# Altium PCB PCB1.PcbDoc
Units mm, origin at the board's own origin, x right, y up, seen from the top; angles counter-clockwise.
Board outline 41.5 x 27.72 mm, 2 copper layers (Top Layer, Bottom Layer); 18 components, 11 nets, 47 pads, 38 vias.
Unrouted connection lines stored in the file: 1.
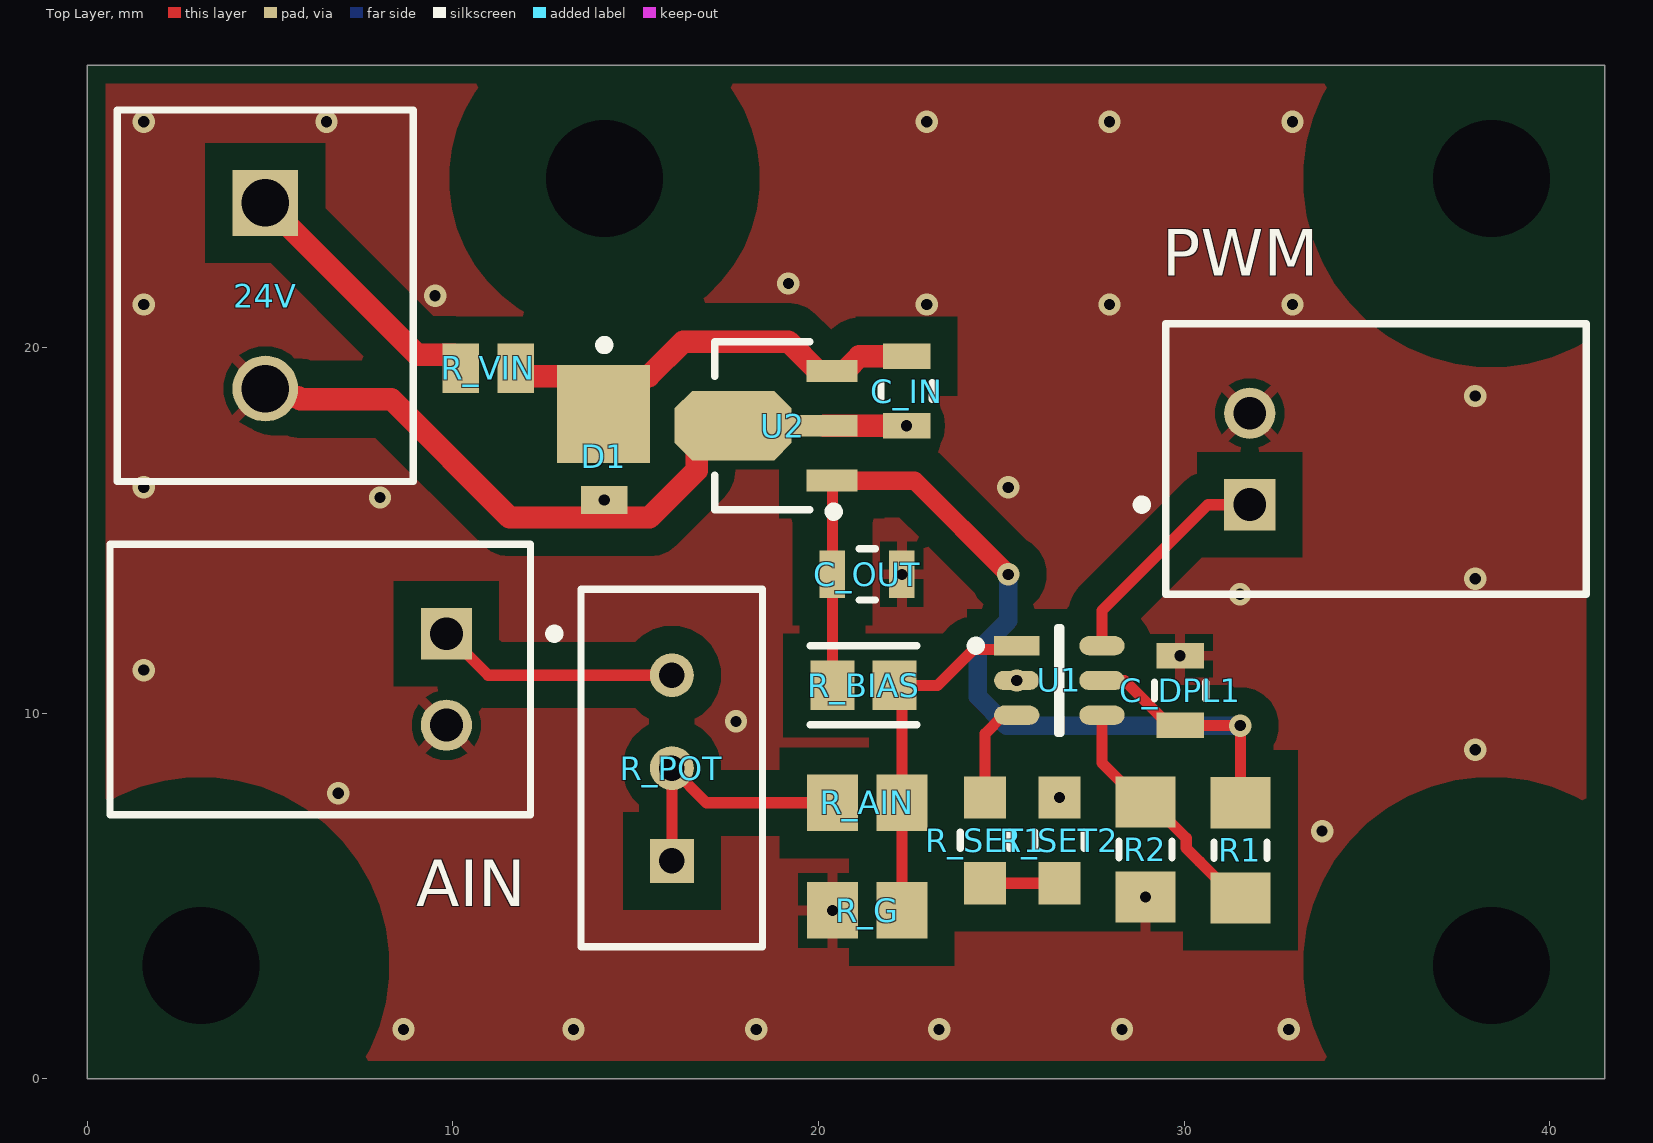
[diagram p0: Top Layer view]
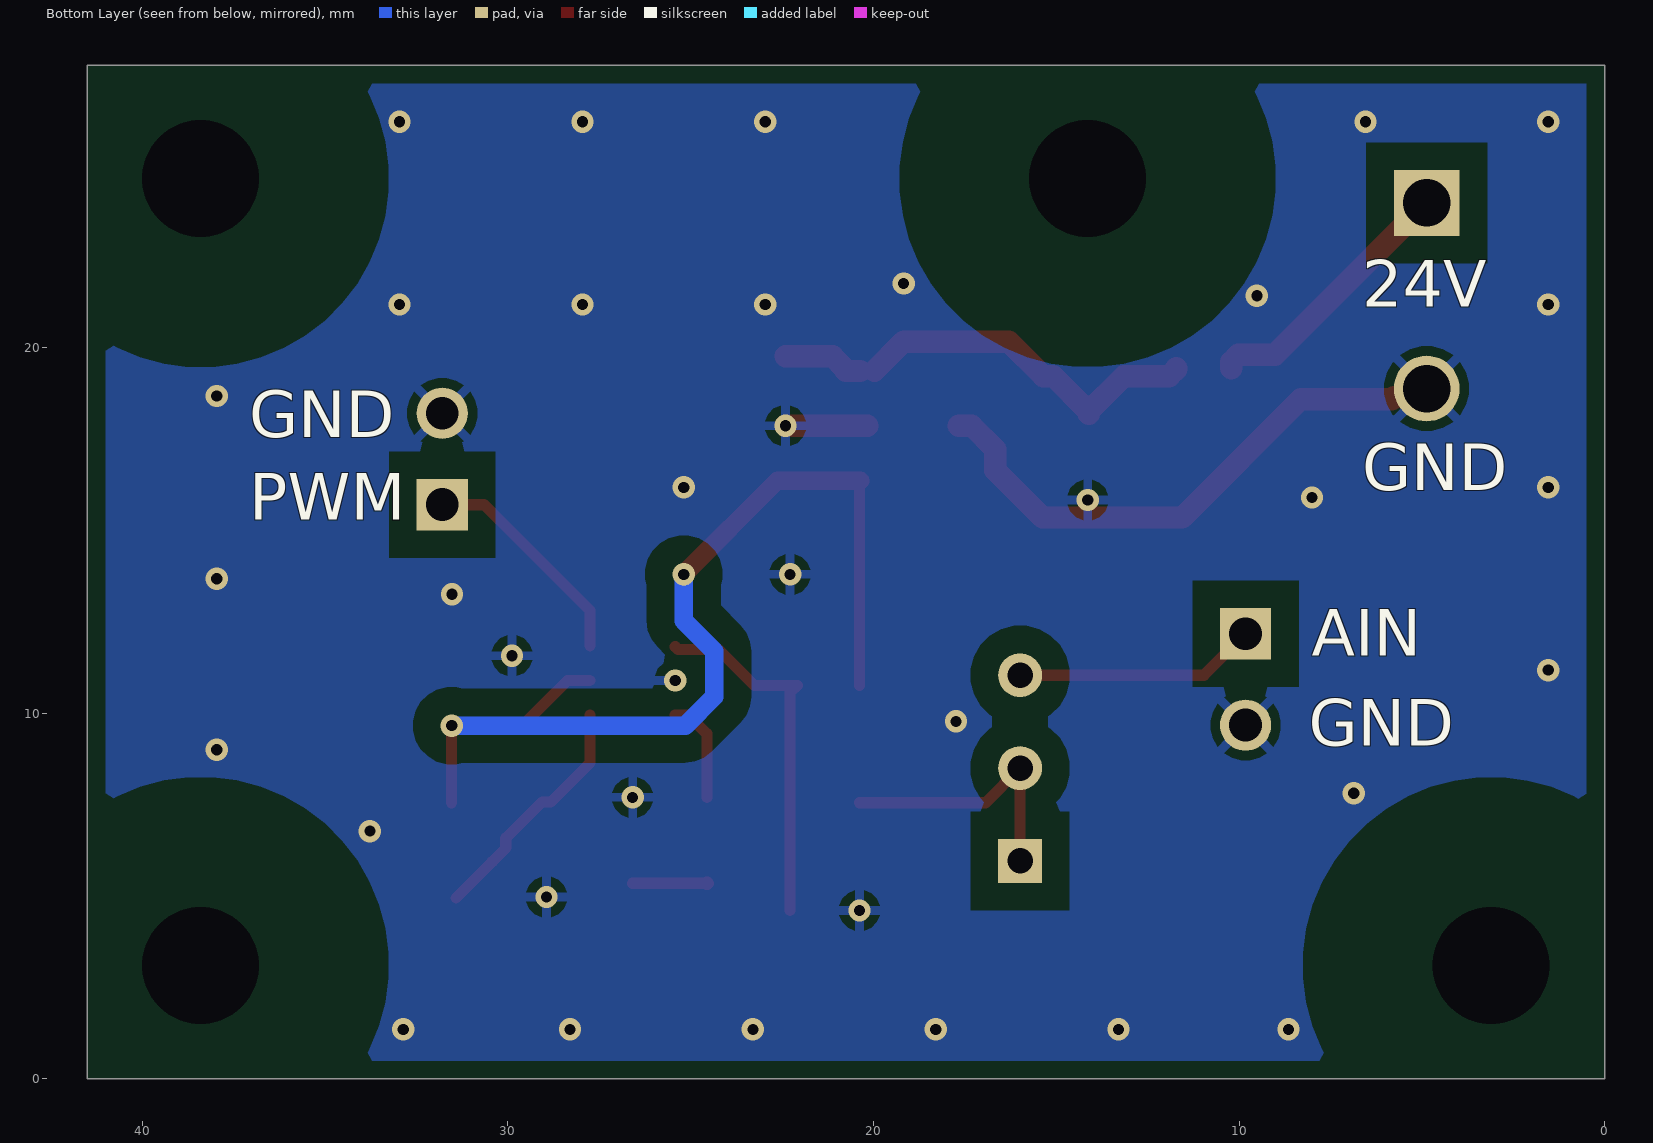
[diagram p1: Bottom Layer view, seen from below]
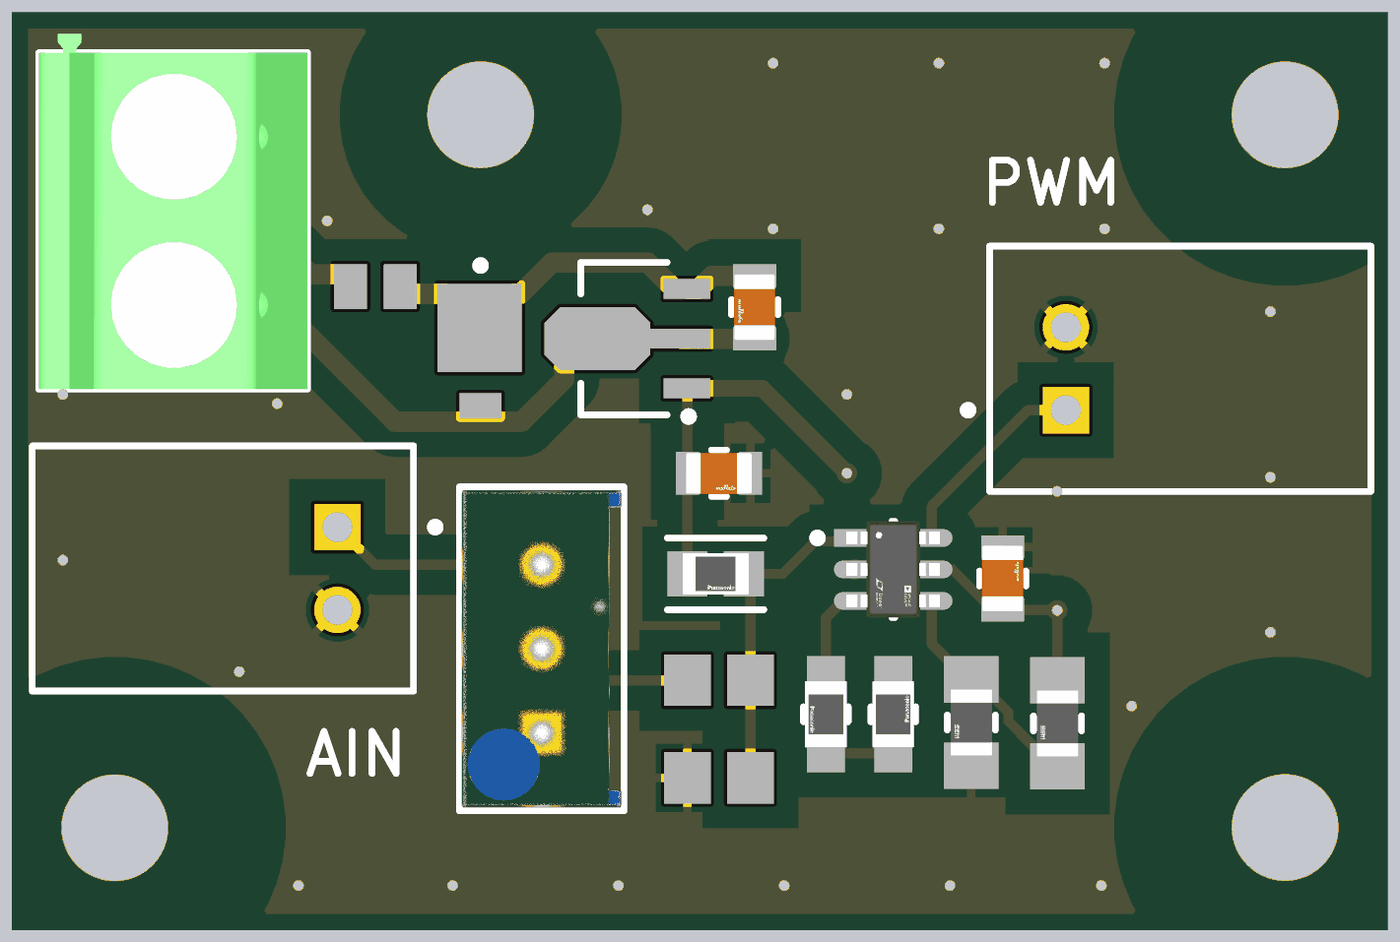
[diagram p2: 3D render of the assembled board from above, using the file's embedded part models]

## Layer stack, top to bottom
Top Solder: solder mask 0.0102, Solder Resist, Dk 3.5
Top Layer: signal copper 0.0356
Dielectric 1: dielectric 0.32, FR-4, Dk 4.8
Bottom Layer: signal copper 0.0356
Bottom Solder: solder mask 0.0102, Solder Resist, Dk 3.5

## Board outline
0,0 41.5,0 41.5,27.72 0,27.72

## Design rules (kind name [scope] priority, off if disabled: settings)
Clearance [All] p1: gap=0.75 ignorepadtopadclearanceinfootprint=FALSE
PlaneClearance [All] p1: clearance=1.5
PolygonConnect [All] p1: thpad.connectstyle=Relief thpad.reliefconductorwidth=0.254 thpad.reliefentries=4 thpad.polygonreliefangle="90 Angle" thpad.airgapwidth=0.254 thpad.conductorbypadedge=TRUE thpad.mindistance=0.381 thpad.enablemindistance=FALSE smdpad.connectstyle=Relief smdpad.reliefconductorwidth=0.254 smdpad.reliefentries=4 smdpad.polygonreliefangle="90 Angle" smdpad.airgapwidth=0.254 smdpad.conductorbypadedge=TRUE smdpad.mindistance=0.381 smdpad.enablemindistance=FALSE via.connectstyle=Direct via.reliefconductorwidth=0.254 via.reliefentries=4 via.polygonreliefangle="90 Angle" via.airgapwidth=0.254
RoutingVias [All] p1: holewidth=0.711 width=1.27 viastyle="Through Hole" minholewidth=0.305 minwidth=0.61 maxholewidth=0.711 maxwidth=1.27
SolderMaskExpansion [All] p1: expansion=0.102 istentingtop=FALSE
SupplyNets "Schematic Supply Nets" [InNet('GND')] p1: voltage=0.000
Width [All] p1: maxlimit=0.762 minlimit=0.127 preferedwidth=0.508 bottomlayer_minwidth=0.254 minimp=50.000000 maximp=50.000000 favimp=50.000000
29 further rules are at their usual default settings.

## Components (designator, comment, footprint, x,y, rotation, side; value= is the part's Value field where it differs from the comment)
24V "1729128" PHOE-1729128-2_V 4.868,21.419 r270 top (schematic designator J1)
AIN "Analog IN" JST-S2B-XH-A(LF)(SN)_V 9.822,10.924 r270 top (schematic designator P_AIN)
C_DPL1 "0.1μF" FP-GCM21B-0_15-MFG 29.887,10.624 r90 top
C_IN "0.33μF" FP-GCM219-0_15-MFG 22.406,18.813 r270 top
C_OUT "0.1μF" FP-GCM21B-0_15-MFG 21.329,13.799 r0 top
D1 "27V" ONSC-POWERMITE-2-457-04_D_V 14.139,16.85 r270 top
PWM "PWM OUT" JST-S2B-XH-A(LF)(SN)_V 31.792,16.954 r90 top (schematic designator P_OUT)
R1 "1MΩ" FP-RG2012-MFG 31.538,6.249 r270 top
R2 "28kΩ" FP-RG2012-MFG 28.941,6.274 r270 top
R_AIN "4.7kΩ" RESC2013X60X40ML20T25 21.329,7.549 r0 top
R_BIAS "100kΩ" FP-ERA6A-IPC_B 21.229,10.762 r0 top
R_G "2kΩ" RESC2013X60X40ML20T25 21.329,4.606 r0 top
R_POT "3296W-1-202LF" FP-3296W-MFG 15.984,8.499 r0 top
R_SET1 "150kΩ" FP-ERA6A-MFG 24.553,6.524 r270 top
R_SET2 "47KΩ" FP-ERA6A-MFG 26.585,6.524 r90 top
R_VIN "330Ω" RESC2013X60X40LL20T25 10.964,19.438 r0 top
U1 "LTC6992MPS6-1#TRMPBF" FP-S6-6-05-08-1636-IPC_B 26.585,10.896 r0 top
U2 "L78L05ABUTR" SOT-89_N 18.463,17.863 r180 top

## Footprints (in the part's own frame and the unit in brackets; to place one, negate y for a bottom-side part, rotate by r counter-clockwise, add the part's x,y. Pads: shape width x height; smd on the part's side, far side on the other; paste and mask are expansions set on the pad)
FP-3296W-MFG [mm]
  rect 1.2x1.2 hole 0.7 paste-2539.97 mask+0: 1(0.005,-2.54)
  round 1.2 hole 0.7 paste-2539.97 mask+0: 2(0.005,0) 3(0.005,2.54)
  silkscreen extent -2.48,-4.89 2.48,4.89, body extent -2.58,-4.99 2.58,4.99, height 0.25
FP-ERA6A-IPC_B [mm]
  rect 1.205x1.362 smd paste+0 mask+0: 1(-0.851,0) 2(0.851,0)
  silkscreen extent -1.45,-1.08 1.45,1.08, body extent -1.7,-0.93 1.7,0.93, height 0.25
FP-ERA6A-MFG [mm]
  rect 1.15x1.15 smd paste+0 mask+0: 1(-1.175,0) 2(1.175,0)
  silkscreen extent -0.22,-0.67 0.22,0.67, body extent -1.85,-0.77 1.85,0.77, height 0.25
FP-GCM21B-0_15-MFG [mm]
  rect 0.7x1.3 smd paste+0 mask+0: 1(-0.95,0) 2(0.95,0)
  silkscreen extent -0.22,-0.7 0.22,0.7, body extent -1.4,-0.8 1.4,0.8, height 0.25
FP-GCM219-0_15-MFG [mm]
  rect 0.7x1.3 smd paste+0 mask+0: 1(-0.95,0) 2(0.95,0)
  silkscreen extent -0.23,-0.7 0.22,0.7, body extent -1.4,-0.8 1.4,0.8, height 0.25
FP-RG2012-MFG [mm]
  rect 1.4x1.65 smd paste+0 mask+0: 1(-1.3,0) 2(1.3,0)
  silkscreen extent -0.23,-0.73 0.23,0.73, body extent -2.1,-0.92 2.1,0.92, height 0.25
FP-S6-6-05-08-1636-IPC_B [mm]
  rect 1.24x0.526 smd paste+0 mask+0: 1(-1.166,0.95)
  rrect100% 1.24x0.526 smd paste+0 mask+0: 2(-1.166,0) 3(-1.166,-0.95) 4(1.166,-0.95) 5(1.166,0) 6(1.166,0.95)
  silkscreen extent -2.41,-1.45 0.05,1.45, body extent -2.04,-1.7 2.04,1.7, height 0.25
JST-S2B-XH-A(LF)(SN)_V [mm] "Header, 2-Leads, Body 7.4x11.5mm, Pitch 2.5mm"
  rect 1.4x1.4 hole 0.9: 1(-1.25,0)
  round 1.4 hole 0.9: 2(1.25,0)
  silkscreen extent -3.7,-9.2 3.7,3.08, body extent -3.7,-9.2 3.7,2.3, height 6.1
ONSC-POWERMITE-2-457-04_D_V [mil] "POWERMITE, 2-Leads, Body 1.965x1.9mm"
  rect 105.12x100 smd: 1(-52.56,-1)
  rect 30x50 smd: 2(40,0)
  silkscreen extent -132,-5 -122,5, body extent -80,-37 -3,37, height 45
PHOE-1729128-2_V [mm] "Receptacle, 2-Leads, Body 8.1x10.16mm, Pitch 5.08mm"
  rect 1.8x1.8 hole 1.3: 1(-2.54,0)
  round 1.8 hole 1.3: 2(2.54,0)
  silkscreen extent -5.08,-4.05 5.08,4.05, body extent -5.65,-4.05 5.08,4.05, height 10.01
RESC2013X60X40LL20T25 [mm] "Chip Resistor, 2-Leads, Body 2.00x1.25mm, IPC High Density"
  rect 1x1.35 smd: 1(-0.75,0) 2(0.75,0)
  body extent -1.1,-0.72 1.1,0.72, height 0.6
RESC2013X60X40ML20T25 [mm] "Chip Resistor, 2-Leads, Body 2.00x1.25mm, IPC Low Density"
  rect 1.4x1.55 smd: 1(-0.95,0) 2(0.95,0)
  body extent -1.1,-0.72 1.1,0.72, height 0.6
SOT-89_N [mm] "SOT89, 3-Leads, Body 4.5x2.4 mm, Pitch 1.5mm, Lead Span 4.1mm, IPC Medium Density"
  rect 1.4x0.6 smd: 1(-1.9,1.5) 3(-1.9,-1.5)
  rect 1.8x0.6 smd: 2(-1.7,0)
  oct 3.2x1.9 smd: 2(0.8,0)
  silkscreen extent -2.08,-2.3 1.3,2.47, body extent -1.3,-2.3 1.3,2.3, height 1.6

## Part data
24V: library part CMP-2000-05815-1, "PCB Terminal Block, 13.5 A, 400 V, 2-Pin THD, RoHS, Bulk", Current Rating=13500mA, Manufacturer="Phoenix Contact", Package Description="2-Pin Through Hole Device, Body 8.1 x 10.16 mm, Pitch 5.08 mm", Package Reference=1729128-2, Package Version=03/2015, Voltage Rating=400V, Datasheet URL=https://datasheet.ciiva.com/16046/1729128-16046181.pdf, Datasheet Version=12/2013, Manufacturer URL=http://www.phoenixcontact.com/, Mounting Technology=ThroughHole, No. of Positions=2, No. of Rows=1, Orientation=Horizontal, Package URL=https://www.phoenixcontact.com/online/portal/pi/pxc/product_detail_page/!ut/p/b1/3VdJjqNKFDxLH8AFycySyWY2ozFsEPOMMQaDOX1XedGL_1Vdm5YXJleknhSKeBkvI6EA8ncAo3AYoDhBQGco6KN7VURTdemj9us_IEKEZo_YHiPAEWEFmDGOHMORkqKYCORBZxgL7ZoaZYcbFFUZ3fqxSY6GOuxydWUuHqz1ynmMFygu583Bob0Ewr6Sd_l-5m-kAueHiB0jpRwZwe58wwtkpxtMYd_LmGcDRU02dRNEyWt6Y2ti5pSyJ_reIkzIulrqApdnbT11V5jnCKbYNCvhEM1MCpPByat_X379-iThf08CI5GfOPqfBeS3BRoBOdD55AKVv0iLwCMq-2BrzXWSGRH7pUGD9uwXQjiph3xL0DKQwdGa0JImiIOmBNOestqgwTHSSs2oOep-78apyXQBvNi8ZLaFjvjWvcaUEBu0MC6Wbe-d6mB0FAebo2lUWinqYaZs5DAYzV0RP9yitUjnGJ0iI9xhZkT42OCQNUJJhkgWINNQLP2JFP6OpMg3JCVg70jqHT0lvKOnhHf0lPuOnnLf0VPuWx6_dxwUIvwk5WMkT0kLL1mh61l2yZVSzG3pYV_bqo-mj6uMKwKwdnnW8Jh5RTOJzMOA5c-eJDaZQw4mTMPH02PvS_ZAqNVjVTo2WyYLkwH_KU1mmmG5kjRhDqPXLwwVHvVOjCM60-fpXvTDfMGW1PVFVS1r4e4yVDk4ZdNbkUHvqPqQSeian4UD39fNKmachqdJ1NJbyk8rXT9mXTvPk3oE5meulKGgiruPJek-4I9hTT6G8ZLOyRSm2RRVbThERQad5OS28hdt4YW4vG0stgYYzsWsK4_7y6DZMjJSCqri1kyiZR5vD7pwIrNR7QwPHTcLTI5qT7eRlpHrdGiupYlqQDJ7zy_CND8fWWBoLRXxk1RVcXiBQwbTD4Xi7KL-FuO94t9xaqweXzH, Packing=Bulk, PartNumber=1729128, Pitch=5.08mm, RoHS=TRUE
AIN PWM: library part CMP-1755-00005-1, "Male Header, Pitch 2.5 mm, 1 x 2 Position, Height 6.1 mm, Tail Length 3.4 mm, -25 to 85 degC, RoHS, Bulk", Capacitance="1 nF", Case\Package=Radial, Max Operating Temperature="125 degC", Min Operating Temperature="-55 degC", Package Quantity=500, Tolerance=10%, Type (Capacitors)=X7R, Voltage Rating="100 V", ComponentLink1Description="Manufacturer URL", ComponentLink1URL=http://www.jst.com/home2.html, ComponentLink2Description=Datasheet, ComponentLink2URL=http://www.jst-mfg.com/product/pdf/eng/eXH.pdf, DatasheetVersion=May-16, Height="2.54 mm", Lead Pitch="2.54 mm", Length="5.33 mm", Mount="Through Hole", PackageDescription="Male Header, Pitch 2.5 mm, 1 x 2 Position, Height 6.1 mm, Tail Length 3.4 mm", PackageReference=S2B-XH-A(LF)(SN), Packaging=Bulk, Pins=2, Radiation Hardening=No, REACH SVHC="No SVHC", RoHSCompliant=true, Voltage Rating (DC)="100 V", Width="3.81 mm"
C_DPL1 C_OUT: library part CMP-2007-03364-2, "Ceramic Capacitor for Automotive 100nF ±10% 100VDC X7R 0805 Embossed T/R", Capacitance=100nF, Case Code (Imperial)=0805, Case Code (Metric)=2012, Dielectric=X7R, Max Operating Temperature=125°C, Min Operating Temperature=-55°C, Package Quantity=1, Ratings=AEC-Q200, Tolerance=10%, Voltage=100V, Case/Package=0805, Depth=1.25mm, Height=1.25mm, Lead Free="Lead Free", Length=2mm, Mount="Surface Mount", Packaging="Tape and Reel", Radiation Hardening=No, REACH SVHC="No SVHC", Termination=SMD/SMT, Thickness=0.055inch, Voltage Rating=100V, Voltage Rating (DC)=100V, Width=0.049inch
C_IN: library part CMP-2007-00092-2, "Ceramic Capacitor for Automotive 330nF  ±10% 50VDC X7R 0805 Paper T/R", Capacitance=330nF, Case Code (Imperial)=0805, Case Code (Metric)=2012, Dielectric=X7R, Max Operating Temperature=125°C, Min Operating Temperature=-55°C, Package Quantity=4000, Ratings=AEC-Q200, Tolerance=10%, Voltage Rating=50V, Case/Package=0805, Depth=1.25mm, Height=0.85mm, Lead Free="Lead Free", Length=2mm, Mount="Surface Mount", Packaging="Tape and Reel", Radiation Hardening=No, Termination=SMD/SMT, Thickness=0.037inch, Voltage Rating (DC)=50V, Width=0.049inch
D1: library part CMP-1060-00053-1, "3.2 W Plastic Surface Mount, 2-Pin POWERMITE, Pb-Free, Tape and Reel", Manufacturer="On Semiconductor", PartNumber=1PMT5935BT1G, ComponentLink1Description="Manufacturer URL", ComponentLink1URL=http://www.onsemi.com/, ComponentLink2Description=Datasheet, ComponentLink2URL=http://www.onsemi.com/pub_link/Collateral/1PMT5920B-D.PDF, ComponentLink3Description="Package Specification", ComponentLink3URL=http://www.onsemi.com/pub_link/Collateral/457-04.PDF, DatasheetVersion="Rev. 4", Mounting Technology="Surface Mount", PackageDescription="2-Pin POWERMITE, Body 1.965 x 1.9 mm", PackageReference=POWERMITE-2-457-04, PackageVersion="Rev. F, 05/2013", Packing="Tape and Reel", RoHS=Pb-Free, VZ Typ (V)=27
R1: library part CMP-2001-02713-2, "Automotive Metal Thin Film Chip Resistor, 0805, 1MΩ, 0.1%, 25ppm/°C, 0.125W, 150V", Case Code (Imperial)=0805, Case Code (Metric)=2012, Max Operating Temperature=155°C, Max Power Dissipation=125mW, Min Operating Temperature=-55°C, Package Quantity=5000, Power Rating=100mW, Resistance=1MR, Temperature Coefficient=25ppm/°C, Tolerance=0.1%, Voltage Rating=100V, Voltage Rating (DC)=150V, Case/Package=0805, Features="Automotive AEC-Q200", Height=0.4mm, Lead Free="Lead Free", Length=2mm, Number of Terminations=2, Packaging="Tape and Reel", RoHS Compliant=Yes, Series=RG, Termination=SMD/SMT, Width=1.25mm
R2: library part CMP-2001-02887-2, "Automotive Metal Thin Film Chip Resistor, 0805, 280kΩ, 0.1%, 25ppm/°C, 0.125W, 150V", Case Code (Imperial)=0805, Case Code (Metric)=2012, Max Operating Temperature=155°C, Max Power Dissipation=125mW, Min Operating Temperature=-55°C, Package Quantity=1, Resistance=280kR, Resistor Type="Thin Film", Temperature Coefficient=25ppm/°C, Tolerance=0.1%, Voltage Rating=150V, Case/Package=0805, Features="Automotive AEC-Q200", Height=0.02inch, Lead Free="Lead Free", Length=0.079inch, Number of Terminations=2, Packaging="Tape and Reel", Power Rating=125mW, RoHS Compliant=Yes, Series=RG, Termination=SMD/SMT, Voltage Rating (DC)=150V, Weight=0.000194oz, Width=0.049inch
R_AIN: library part CMP-2001-00644-1, Manufacturer=Panasonic, Part Number=ERA6AEB472V
R_BIAS: library part CMP-2001-00583-2, "RES 100K OHM 0.1% 1/8W 0805", Case Code (Imperial)=0805, Case Code (Metric)=2012, Max Operating Temperature=155°C, Max Power Dissipation=125mW, Min Operating Temperature=-55°C, Package Quantity=1, Resistance=100kR, Resistance Tolerance=0.1%, Resistor Type="Thin Film", Temperature Coefficient=25ppm/°C, Voltage Rating=100V, Case/Package=0805, Construction=Rectangular, Contact Plating=Tin, Depth=1.25mm, Features="Automotive AEC-Q200", Height=0.5mm, Lead Free="Lead Free", Length=2mm, Military Standard=Not, Mount="Surface Mount", Number of Pins=2, Number of Terminations=2, Packaging="Tape and Reel", Power Rating=125mW, Radiation Hardening=No, REACH SVHC="No SVHC", RoHS Compliant=Yes, Series=ERA-6A, Size Code=0805, Technology="METAL FILM", Termination=Solder, Tolerance=0.1%, Voltage Rating (DC)=100V, Width=1.25mm
R_G: library part CMP-2001-00609-1, Manufacturer=Panasonic, Part Number=ERA6AEB202V
R_POT: library part CMP-2000-05582-2, "TRIMMER 2K OHM 0.5W PC PIN TOP", Color=Blue, Max Operating Temperature=125°C, Max Power Dissipation=500mW, Min Operating Temperature=-55°C, Package Quantity=50, Resistance=2kR, Resistance Tolerance=10%, Resistor Type=Cermet, Temperature Coefficient=100ppm/°C, Contact Plating=Tin, Depth=4.83mm, Height=0.395inch, Lead Free="Lead Free", Length=9.53mm, Military Standard=Not, Mount=Panel, Number of Turns=25, Packaging=Rail/Tube, Power Rating=500mW, Radiation Hardening=No, REACH SVHC="No SVHC", RoHS Compliant=Yes, Series=3296, Taper=Linear, Technology=CERMET, Termination=Pin, Tolerance=10%, Weight=0.03oz, Width=9.53mm
R_SET1: library part CMP-2001-00599-2, "RES 150K OHM 0.1% 1/8W 0805", Case Code (Imperial)=0805, Case Code (Metric)=2012, Max Operating Temperature=155°C, Max Power Dissipation=125mW, Min Operating Temperature=-55°C, Package Quantity=5000, Resistance=150kR, Resistance Tolerance=0.1%, Resistor Type="Thin Film", Temperature Coefficient=25ppm/°C, Voltage Rating=100V, Case/Package=0805, Construction=Rectangular, Contact Plating=Tin, Depth=1.25mm, Height=0.5mm, Lead Free="Lead Free", Length=2mm, Military Standard=Not, Mount="Surface Mount", Number of Pins=2, Number of Terminations=2, Packaging="Tape and Reel", Power Rating=125mW, Radiation Hardening=No, REACH SVHC="No SVHC", RoHS Compliant=Yes, Series=ERA-6A, Technology="METAL FILM", Termination=SMD/SMT, Tolerance=0.1%, Voltage Rating (DC)=100V, Width=1.25mm
R_SET2: library part CMP-2001-00645-2, Case Code (Imperial)=0805, Case Code (Metric)=2012, Max Operating Temperature=155°C, Max Power Dissipation=125mW, Min Operating Temperature=-55°C, Resistance=47kΩ, Temperature Coefficient=25ppm/°C, Tolerance=0.1%, Voltage Rating=100V, Case/Package=0805, Composition="Metal Film, Thin Film", Contact Plating=Tin, Depth=1.25mm, Features="Automotive AEC-Q200", Height=500µm, Lead Free="Lead Free", Length=2mm, Lifecycle Status=Production, Military Standard=Not, Mount="Surface Mount", NexarPartId=1264112, Number of Pins=2, Number of Terminations=2, Packaging="Cut Tape", Power Rating=125mW, Radiation Hardening=No, REACH SVHC="No SVHC", RoHS=Compliant, Schedule B="8533210045, 8533210045", Termination=SMD/SMT, Voltage Rating (DC)=100V, Weight=5.499807mg, Width=1.25mm
R_VIN: library part CMP-2001-00628-1, Manufacturer=Panasonic, Part Number=ERA6AEB331V
U1: library part CMP-09075-000003-1, "IC OSC SILICON PROG TSOT23-6", Case/Package=SOT-23-6, Frequency=3.81Hz, Max Operating Temperature=125°C, Min Operating Temperature=-55°C, Operating Supply Current=365uA, Package Quantity=500, Mount="Surface Mount", Number of Pins=6, Packaging="Tape and Reel", RoHS Compliant=Yes, Series=TimerBlox®
U2: library part CMP-0244-00406-1, "Positive Voltage Regulator, 5V, 4-Pin SOT-89, Tape and Reel", ComponentLink1Description="Manufacturer URL", ComponentLink1URL=http://www.st.com, ComponentLink2Description=Datasheet, ComponentLink2URL=http://www.st.com/internet/com/TECHNICAL_RESOURCES/TECHNICAL_LITERATURE/DATASHEET/CD00000446.pdf, DatasheetVersion=1/02/2011, PackageDescription="3-Pin SOT-89 Package 1.5 mm Pitch, 4.1 mm Lead Span", PackageReference=SOT-89, PackageVersion=2011

## Free pads (board coordinates)
  round 0 / inner round 6.2 / far side round 0 hole 3.2: ""(3.109,3.097) ""(14.142,24.62) ""(38.402,3.105)
  round 0 hole 3.2: ""(38.402,24.618)

## Via types
v1: diameter 0.61, hole 0.305, Top Layer to Bottom Layer, tented both sides, 38 vias

## Nets (pads, with @x,y where several pads share a name; then routed paths per layer and width w, separated by ;. In a path a pad name is that pad's centre, name@x,y a point inside that pad or via, vN(x,y) a via of type N, cw(c..) or ccw(c..) an arc to the next point about the centre after c; other vN are vias at no path point)
GND: 24V.2 AIN.2 C_DPL1.2 C_IN.2 C_OUT.2 D1.2 PWM.2 R2.2 R_G.1 R_SET2.2 U1.2 U2.2 | length 17.9
  Top Layer w0.61: 24V.2 5.096,18.651 5.757,18.651 5.82,18.588 8.316,18.588 11.551,15.353 15.378,15.353 16.665,16.639 16.665,17.217 17.31,17.863 U2.2@17.663,17.863 ; U2.2@20.163,17.863 v1(22.406,17.863)
  other v1: 8.649,1.353 13.297,1.353 18.297,1.353 23.297,1.353 28.297,1.353 32.861,1.353 20.379,4.606 28.941,4.974 33.773,6.774 26.585,7.699 6.862,7.811 37.959,8.999 17.741,9.776 25.42,10.896 1.541,11.178 29.887,11.574 31.525,13.254 37.959,13.678 22.279,13.799 14.139,15.834 8.005,15.9 1.541,16.178 25.188,16.178 37.959,18.678 1.541,21.178 22.959,21.178 27.959,21.178 32.959,21.178 9.513,21.418 19.173,21.753 1.541,26.178 6.541,26.178 22.959,26.178 27.959,26.178 32.959,26.178
Net24V_1: 24V.1 R_VIN.1 | length 7.3
  Top Layer w0.61: 24V.1 9.019,19.808 10.019,19.808 10.214,19.613 R_VIN.1
NetAIN_1: AIN.1 R_POT.3 | length 6.6
  Top Layer w0.305: AIN.1 10.956,11.039 R_POT.3
NetC_IN_1: C_IN.1 D1.1 R_VIN.2 U2.3 | length 12.2
  Top Layer w0.61: R_VIN.2 11.714,19.411 11.909,19.215 13.148,19.215 D1.1@14.114,18.25 ; D1.1 D1.1@14.114,18.25 ; U2.3@19.968,19.367 19.173,20.163 16.301,20.163 15.354,19.215 15.079,19.215 D1.1@14.114,18.25 ; U2.3 20.754,19.363 20.758,19.367 20.758,19.405 21.116,19.763 C_IN.1
NetPWM_1: PWM.1 U1.6 | length 6.2
  Top Layer w0.305: U1.6 27.751,12.805 30.649,15.704 PWM.1
NetR1_2: R1.2 R2.1 U1.4 | length 6.7
  Top Layer w0.305: U1.4 27.751,8.639 28.816,7.574 R2.1 29.066,7.574 30.055,6.585 30.055,6.316 30.424,5.947 30.424,5.938 R1.2@31.413,4.949
NetR_AIN_1: R_AIN.1 R_POT.1 R_POT.2 | length 7.3
  Top Layer w0.305: R_POT.1 R_POT.2 16.939,7.549 R_AIN.1
NetR_AIN_2: R_AIN.2 R_BIAS.2 R_G.2 U1.1 | length 10
  Top Layer w0.305: R_G.2 R_AIN.2 22.279,10.564 R_BIAS.2 23.254,10.762 24.235,11.744 25.347,11.744 U1.1@25.42,11.816
NetR_SET1_1: R_SET1.1 U1.3 | length 2.8
  Top Layer w0.305: R_SET1.1 24.553,9.437 25.063,9.946 U1.3
NetR_SET1_2: R_SET1.2 R_SET2.1 | length 2
  Top Layer w0.305: R_SET1.2 R_SET2.1
VDD: C_DPL1.1 C_OUT.1 R1.1 R_BIAS.1 U1.5 U2.1 | length 29.1
  Top Layer w0.305: R_BIAS.1 C_OUT.1 U2.1@20.379,16.347 ; U1.5 27.754,10.893 28.368,10.893 29.587,9.674 C_DPL1.1 29.894,9.667 v1@31.525,9.667 ; v1(31.532,9.66) 31.538,9.654 R1.1
  Top Layer w0.508: U2.1@20.357,16.362 U2.1 22.624,16.362 v1(25.188,13.799)
  Bottom Layer w0.508: v1(25.188,13.799) 25.188,12.53 24.355,11.697 24.355,10.455 25.15,9.66 v1(31.532,9.66)

## Polygon pours and split planes (outlines as drawn)
GND on Bottom Layer "GND_L02_P001" (solid, remove dead copper, pour order 1): 0.5,27.22 0.5,0.5 41,0.5 41,27.22
GND on Top Layer "GND_L01_P000" (solid, remove dead copper, pour order 0): 0.5,27.22 0.5,0.5 41,0.5 41,27.22

## Silkscreen, mask and mechanical layers (free items; w line width, h text height)
Bottom Overlay:
  text "24V" at 6.635,21.122 h1.27
  text "GND" at 37.076,17.542 h1.27
  text "GND" at 6.635,16.103 h1.27
  text "PWM" at 37.076,15.296 h1.27
  text "AIN" at 8.005,11.573 h1.27
  text "GND" at 8.095,9.113 h1.27
Top Designator:
  circle w0.013: c38.485,2.898 r1.6
  circle w0.013: c3.135,2.898 r1.6
  circle w0.013: c26.77,23.651 r1.6
  lines w0.013: 0,0 0,27.72 41.5,27.72 41.5,0 0,0